# EAGLE board LM2575-1b (EAGLE 5.04)
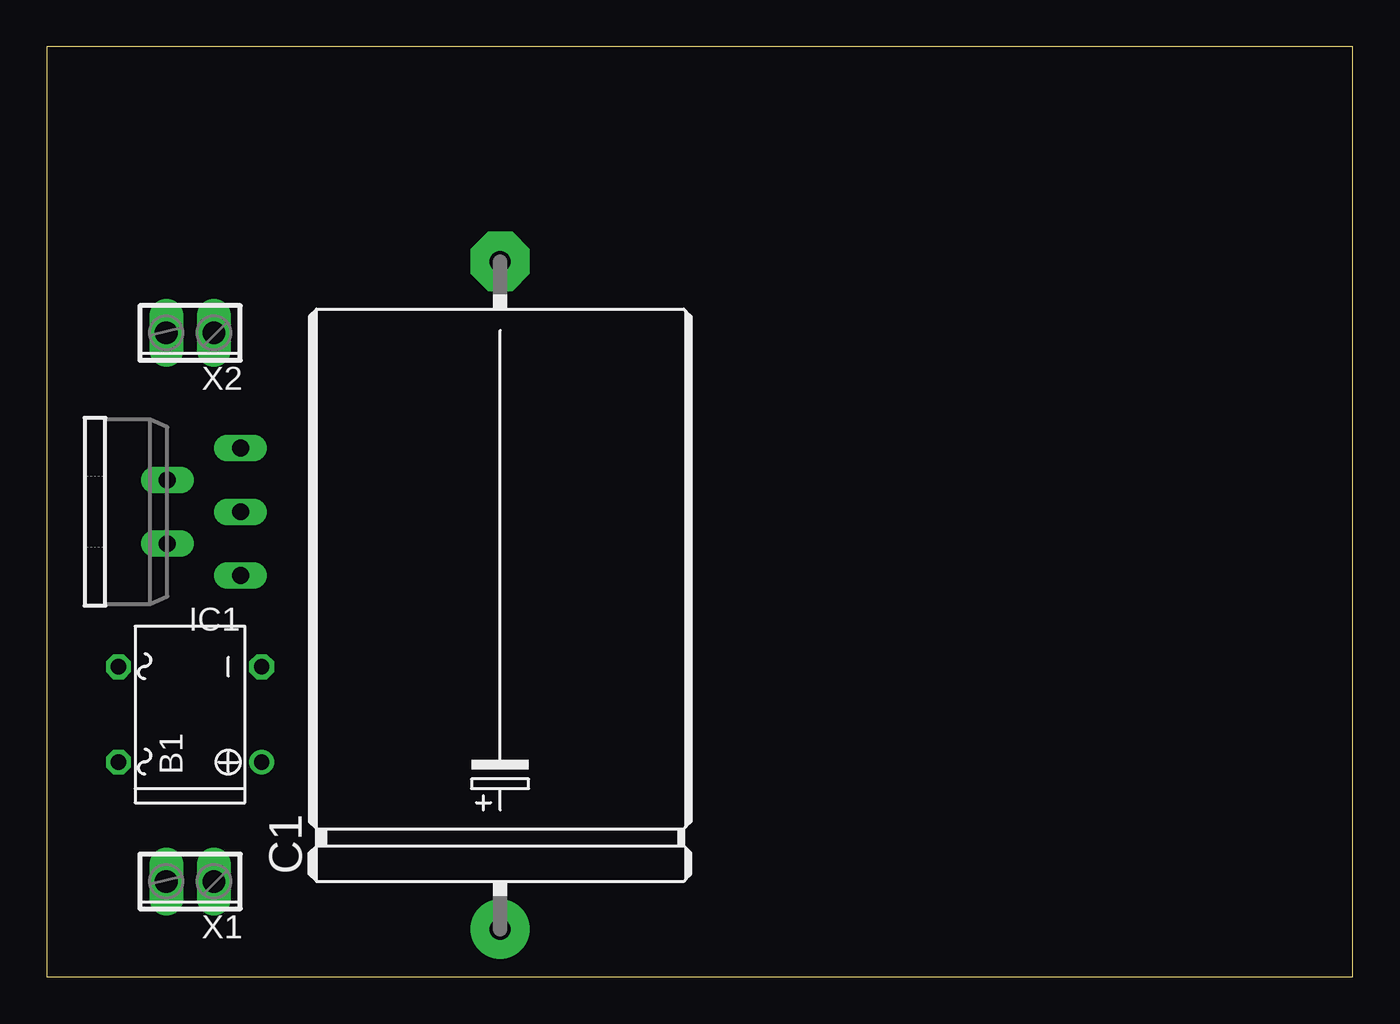
[diagram p0: board, top side]
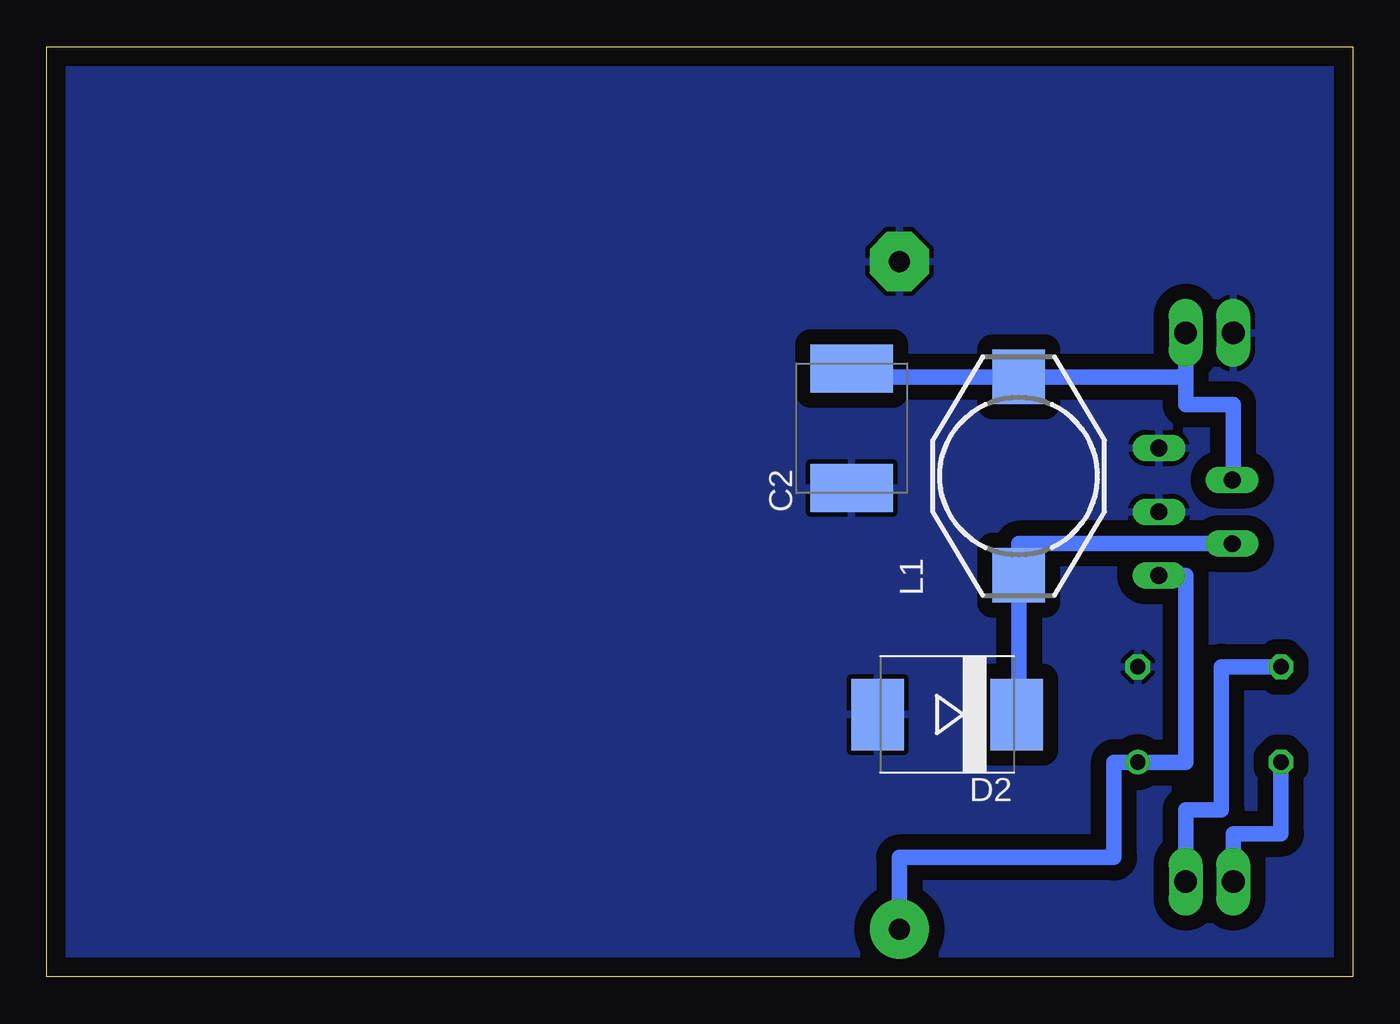
[diagram p1: board, bottom side, seen from below]

Size 69.52 x 49.52 mm. Coordinates in mm from the lower left corner, seen from the top.
Outline: 0,0 69.52,0 69.52,49.52 0,49.52 0,0
Copper layers (1*16): Top 0.035mm / dielectric 1.5mm / Bottom 0.035mm
Design rules "default": minimum track width 10mil, minimum drill 24mil, track to track 8mil, track to pad 8mil, pad to pad 8mil, via to via 8mil, smd to smd 8mil, copper to edge 40mil, drill to drill 8mil, minimum pad ring 10mil, minimum via ring 8mil, stop-mask expansion 4mil, vias tented up to drill 0mil, thermal gap 10mil

## Footprints (pad centres in the part's own frame; a part is rotated, then mirrored left to right if it is on the bottom)
B-DIL = drill 0.813 round: + -2.54,-3.81 | drill 0.813 octagon: - 2.54,-3.81; AC1 2.54,3.81; AC2 -2.54,3.81
E35-18 = drill 1.118 pad 3.15 round: + -17.78,0 | drill 1.118 pad 3.15 octagon: - 17.78,0
E/7260-38R = smd 2.55 x 4.4: + 3.175,0; - -3.175,0
SMC = smd 2.8 x 3.8: A 3.7,0; C -3.7,0
TO220-5 = drill 0.9 long: 1 -3.4,-8.4; 2 -1.7,-4.5; 3 0,-8.4; 4 1.7,-4.5; 5 3.4,-8.4
DO3316P = smd 2.92 x 2.79: 1 -5.28,0; 2 5.28,0
2POL254 = drill 1.2 long: 1 -1.27,0; 2 1.27,0

## Placement (x,y rotation side)
B1  [B-DIL]  7.62,13.97 90 top
C1  [E35-18]  24.13,20.32 90 top
C2  [E/7260-38R]  26.67,29.21 90 bottom
D2  [SMC]  21.59,13.97 180 bottom
IC1  LM2575T  [TO220-5]  1.91,24.77 90 top
L1  [DO3316P]  17.78,26.67 90 bottom
X1  [2POL254]  7.62,5.08 180 top
X2  [2POL254]  7.62,34.29 180 top

## Library data of the parts
B1 = rectifier
C1 C2 = rcl
D2 = diode
IC1 = v-reg-3
L1 = inductor-coilcraft
X1 X2 = con-phoenix-254

## Nets
GND: B1.- C1.- C2.- D2.A IC1.3 IC1.5 X2.2
N$1: D2.C IC1.2 L1.1
N$2: B1.+ C1.+ IC1.1
N$3: C2.+ IC1.4 L1.2 X2.1
N$4: B1.AC1 X1.1
N$5: B1.AC2 X1.2

## Tracks (layer width: path | path; a pad name or v marks a point on that pad's centre or on a via)
GND
  pour Bottom (isolate 0.813): 0,49.53 69.85,49.53 69.85,0 0,0
N$1
  Bottom 0.813: IC1.2 17.78,23.07 17.78,21.59 | 17.78,21.59 L1.1 | 17.78,21.59 17.78,14.61 | 17.78,14.61 17.78,13.97 | 17.78,14.61 17.89,14.61 D2.C
N$2
  Bottom 0.813: IC1.1 8.89,21.36 8.89,11.43 B1.+ 12.7,11.43 12.7,6.35 24.13,6.35 C1.+
N$3
  Bottom 0.813: IC1.4 6.35,26.46 6.35,30.48 8.89,30.48 8.89,31.95 | C2.+ 26.67,31.95 L1.2 8.89,31.95 | 8.89,31.95 X2.1
N$4
  Bottom 0.813: X1.1 8.89,8.89 6.99,8.89 6.99,16.51 B1.AC1
N$5
  Bottom 0.813: B1.AC2 3.81,7.62 6.35,7.62 X1.2